# EAGLE board supply (EAGLE 7.4.0)
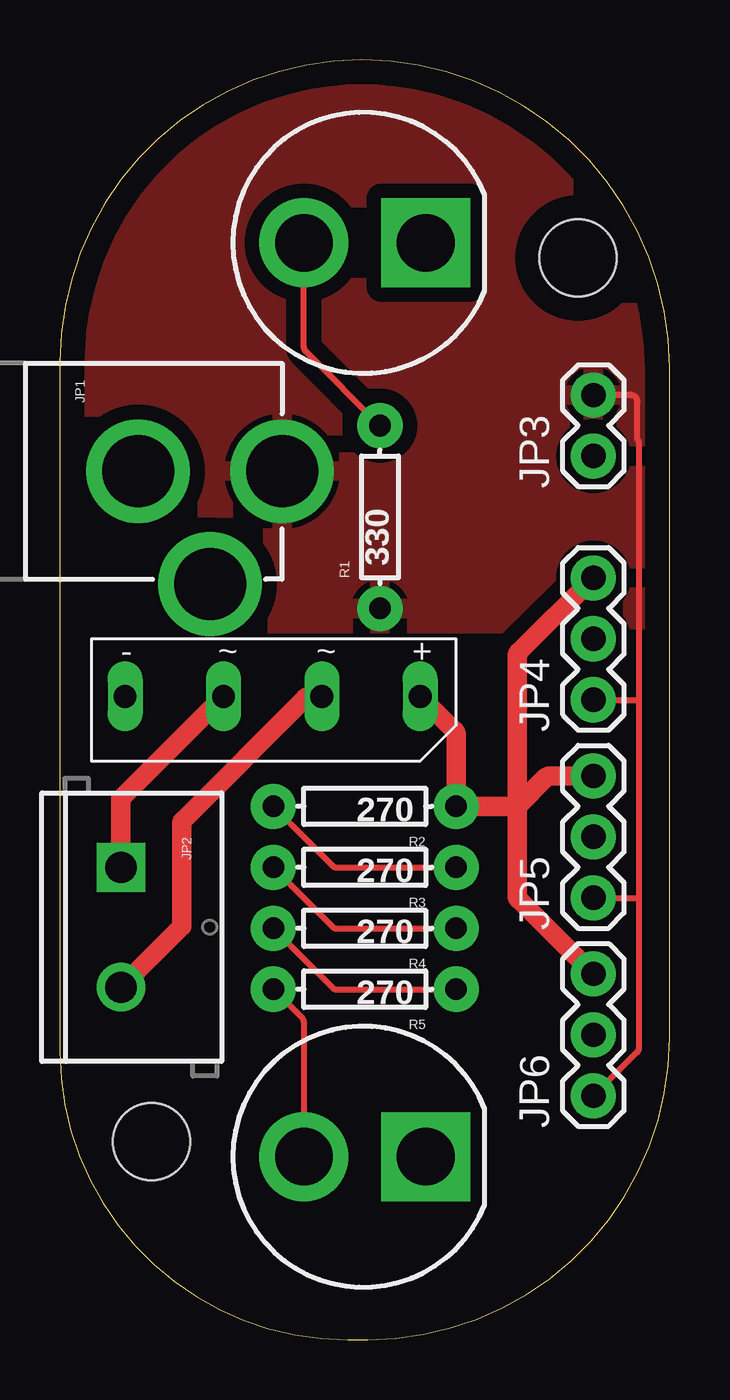
[diagram p0: board, top side]
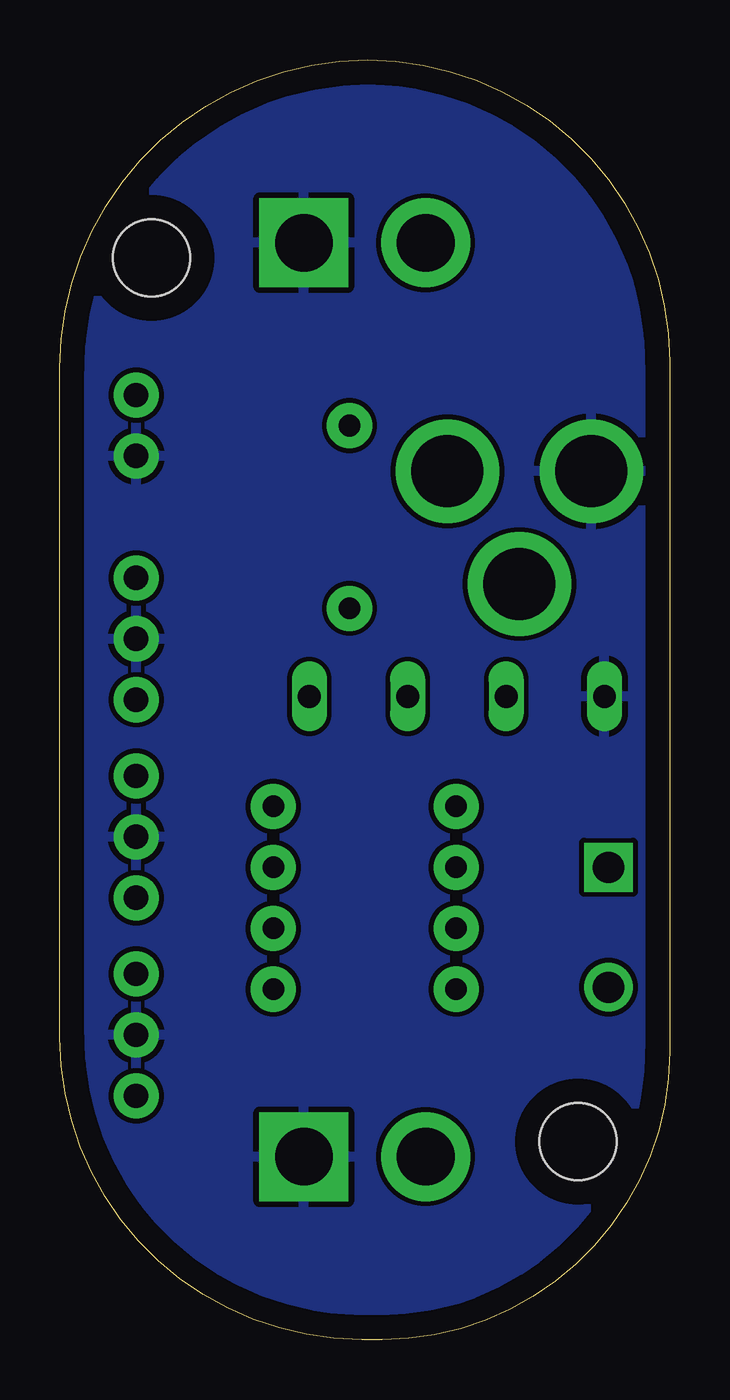
[diagram p1: board, bottom side, seen from below]

Size 25.4 x 53.34 mm. Coordinates in mm from the lower left corner, seen from the top.
Outline: 11.98,0 12.83,0 arc90 25.4,12.57 25.4,40.51 arc90 12.57,53.34 arc90 0,40.77 0,11.98 arc90 11.98,0
Copper layers (1*16): Top 0.035mm / dielectric 1.5mm / Bottom 0.035mm
Design rules "default": minimum track width 10mil, minimum drill 24mil, track to track 8mil, track to pad 8mil, pad to pad 8mil, via to via 8mil, smd to smd 8mil, copper to edge 40mil, drill to drill 8mil, minimum pad ring 10mil, minimum via ring 8mil, stop-mask expansion 4mil, vias tented up to drill 0mil, thermal gap 10mil
Holes 3.2 mm at 21.59,45.09 3.81,8.25

## Footprints (pad centres in the part's own frame; a part is rotated, then mirrored left to right if it is on the bottom)
LED10MM = drill 2.4 pad 3.7: A 2.54,0 | drill 2.4 pad 3.7 square: C -2.54,0
POWER_JACK_PTH = drill 2.997 pad 4.318: GND 0,7.7; GNDBREAK 4.7,10.7; PWR 0,13.7
SCREWTERMINAL-5MM-2 = drill 1.3 pad 2.032 square: 1 0,0 | drill 1.3 pad 2.032: 2 5,0
1X02 = drill 1.016 pad 1.88: 1 0,0; 2 2.54,0
1X03 = drill 1.016 pad 1.88: 1 0,0; 2 2.54,0; 3 5.08,0
AXIAL-0.3EZ = drill 0.9 pad 1.88: P$1 -3.81,0; P$2 3.81,0
3KBP0X = drill 0.95 long: + 1.5,2.4; - 13.8,2.4; I1 5.6,2.4; I2 9.7,2.4

## Placement (x,y rotation side)
D3  [LED10MM]  12.7,45.72 180 top
D4  [LED10MM]  12.7,7.62 180 top
JP1  POWER_JACKPTH  [POWER_JACK_PTH]  -4.45,36.2 270 top
JP2  [SCREWTERMINAL-5MM-2]  2.54,19.69 270 top
JP3  [1X02]  22.23,36.83 90 top
JP4  [1X03]  22.23,26.67 90 top
JP5  [1X03]  22.23,18.41 90 top
JP6  [1X03]  22.23,10.16 90 top
R1  330  [AXIAL-0.3EZ]  13.33,34.29 90 top
R2  270  [AXIAL-0.3EZ]  12.7,22.23 180 top
R3  270  [AXIAL-0.3EZ]  12.7,19.69 180 top
R4  270  [AXIAL-0.3EZ]  12.7,17.14 180 top
R5  270  [AXIAL-0.3EZ]  12.7,14.61 180 top
U$1  3KBP0X  [3KBP0X]  16.51,29.21 180 top

## Library data of the parts
D3 D4 = SparkFun-LED
JP1 = SparkFun-Connectors; PROD_ID: CONN-08197
JP2 = SparkFun-Connectors; STOREFRONT_ID: PRT-08432
JP3-JP6 = SparkFun-Connectors
R1-R5 = SparkFun-Resistors; PROD_ID: RES-08380
U$1 = custom-parts

## Nets
5V: JP1.PWR JP3.2 JP4.1 JP5.1 JP6.1 R1.P$1
GND: D3.C D4.C JP1.GND JP3.1 JP4.2 JP5.2 JP6.2 U$1.-
I1: JP2.2 U$1.I1
I2: JP2.1 U$1.I2
N$1: R2.P$2 R3.P$1
N$2: D4.A R5.P$2
N$3: R3.P$2 R4.P$1
N$4: D3.A R1.P$2
N$5: R4.P$2 R5.P$1
V+: JP4.3 JP5.3 JP6.3 R2.P$1 U$1.+

## Tracks (layer width: path | path; a pad name or v marks a point on that pad's centre or on a via)
5V
  Top 0.254: JP6.1 24.06,11.99 arc45 24.13,12.17 24.13,18.41 | 24.13,18.41 24.13,26.67 | JP5.1 24.13,18.41 | JP4.1 24.13,26.67 | 24.13,26.67 24.13,37.36 arc45 24.06,37.54 24.06,39.12 arc90 23.8,39.37 JP3.2
  pour Top (isolate 0.61): -5.08,29.84 32.39,29.84 32.39,56.52 -5.08,56.52
GND
  pour Bottom: -5.08,-2.54 -5.08,77.47 95.25,77.47 95.25,-2.54
I1
  Top 0.813: JP2.2 5.08,17.23 5.08,21.48 arc-45 5.15,21.66 10.23,26.74 arc-45 10.4,26.81 U$1.I1
I2
  Top 0.813: JP2.1 2.54,22.54 U$1.I2
N$1
  Top 0.254: R2.P$2 11.43,19.69 R3.P$1
N$2
  Top 0.254: D4.A 10.16,13.23 arc45 10.09,13.41 R5.P$2
N$3
  Top 0.254: R3.P$2 11.43,17.14 R4.P$1
N$4
  Top 0.254: R1.P$2 10.23,41.2 arc-45 10.16,41.38 D3.A
N$5
  Top 0.254: R4.P$2 11.43,14.61 R5.P$1
V+
  Top 0.813: JP4.3 19.12,28.65 arc45 19.05,28.47 19.05,22.23 | 19.05,22.23 19.05,18.52 arc45 19.12,18.34 JP6.3 | 19.05,22.23 R2.P$1 16.51,25.21 arc45 16.44,25.38 U$1.+ | 19.05,22.23 20.25,23.42 arc-45 20.42,23.5 JP5.3